# Altium PCB HLW8012-Demo.PcbDoc (part 2 of 2)
Units mil, origin at the board's own origin, x right, y up, seen from the top; angles counter-clockwise.
Board outline 2529.72 x 3317.12 mil, 2 copper layers (Top Layer, Bottom Layer); 82 components, 76 nets, 315 pads, 169 vias.
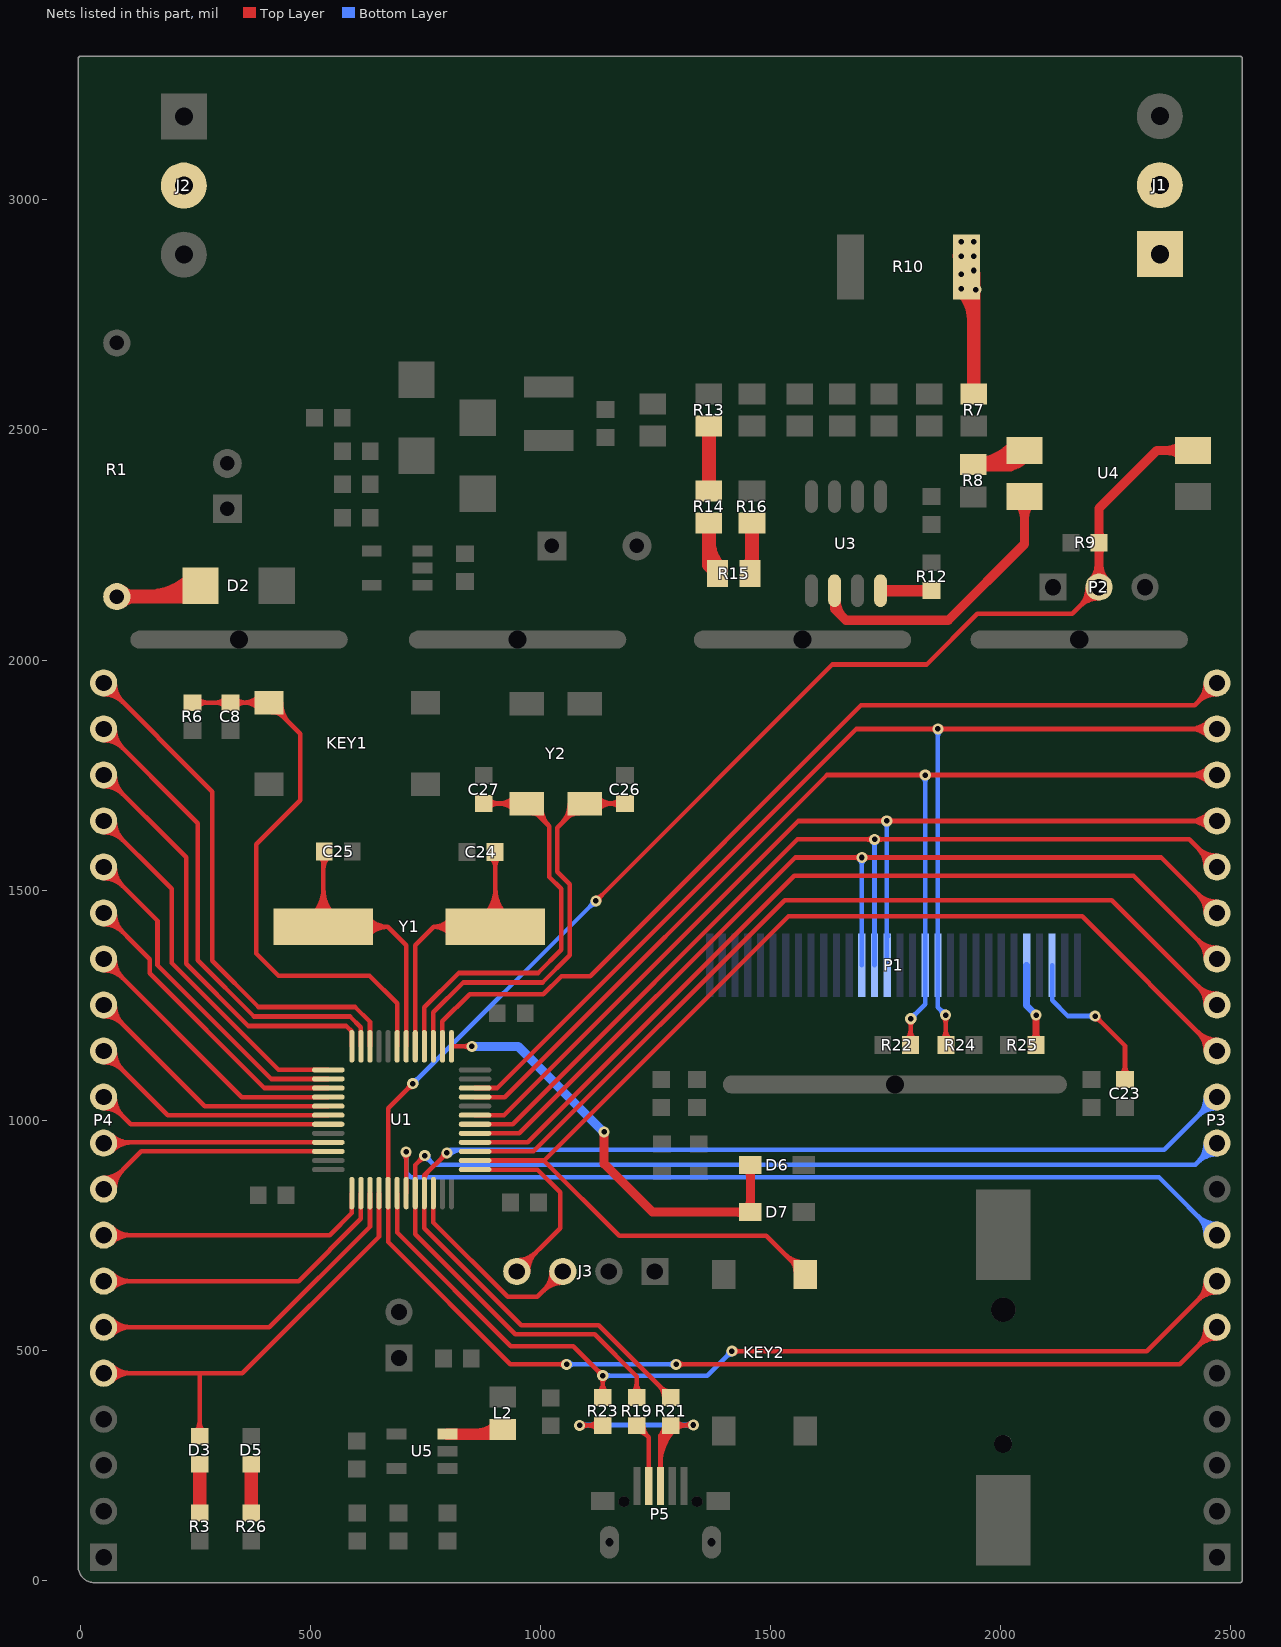
[diagram p2: the nets of this part, all layers, seen from the top]

## Via types
v1: diameter 24, hole 12, Top Layer to Bottom Layer, tented both sides, 169 vias

## Nets (pads, with @x,y where several pads share a name; then routed paths per layer and width w, separated by ;. In a path a pad name is that pad's centre, name@x,y a point inside that pad or via, vN(x,y) a via of type N, cw(c..) or ccw(c..) an arc to the next point about the centre after c; other vN are vias at no path point) (continued)
NetC23_2: C23.2 P1.28 | length 452.2
  Top Layer w10: v1@2204.72,1219.38 cw(c2204.72,1202.48) 2216.67,1214.43 cw(c2228.62,1226.38) v1@2211.72,1226.38 ; v1(2204.72,1226.38) 2269.69,1161.42 C23.2@2269.69,1088.19 ; C23.2@2260.28,1097.6 ccw(c2237.56,1120.32) 2269.69,1120.32 ccw(c2301.81,1120.32) C23.2@2279.09,1097.6
  Bottom Layer w10: P1.28@2111.22,1336.61 2111.22,1260.83 2145.67,1226.38 v1(2204.72,1226.38) ; v1@2199.77,1221.43 ccw(c2187.82,1209.48) 2187.82,1226.38 ccw(c2187.82,1243.28) v1@2199.77,1231.33
NetD2_1: D2.1 R1.2 | length 409.2
  Top Layer w30: R1.2@78.74,2137.8 237.2,2137.8 D2.1@260.83,2161.42 ; R1.2@89.01,2127.52 cw(c113.81,2102.72) 113.81,2137.8 cw(c113.81,2172.87) R1.2@89.01,2148.07 ; 144.96,2137.8 ccw(c144.96,2277.28) D2.1@243.59,2178.65 ; 217.39,2137.8 ccw(c217.39,2204.85) D2.1@264.81,2157.44
NetD3_A: D3.A R3.1 | length 105.9
  Top Layer w30: R3.1@258.86,146.46 D3.A@258.86,252.36
NetD5_A: D5.A R26.1 | length 105.7
  Top Layer w30: R26.1@371.06,146.46 D5.A@371.06,252.17
NetJ1_1: J1.1 R7.2 R10.1 | length 417.7
  Top Layer w30: R10.1@1911.65,2841.03 cw(c1924.85,2822.49) R10.1@1940.94,2838.58 ; R10.1@1914.92,2802.72 cw(c1852.11,2739.9) 1940.94,2739.9 ; R10.1@1925.2,2854.33 R10.1@1940.94,2838.58 ; R7.2@1940.94,2578.35 R10.1@1940.94,2838.58 ; R10.1@1910.39,2877.95 ccw(c1931.66,2877.95) 1916.62,2862.91 cw(c1931.66,2877.95) R10.1@1910.39,2877.95
  other v1: 1945.87,2805.12 1913.39,2807.09 1913.39,2838.58 1940.94,2846.46 1913.39,2877.95 1940.94,2877.95 1913.39,2909.45 1940.94,2909.45
NetJ1_2: J1.2 J2.2
NetL2_1: L2.1 U5.3 | length 171.4
  Top Layer w25: U5.3@797.24,317.91 907.09,317.91 L2.1@917.32,328.15 ; 861.56,317.91 ccw(c861.56,377.81) L2.1@903.91,335.46
NetP1_26: P1.26 R25.2 | length 222.9
  Top Layer w15: R25.2@2068.93,1172.01 ccw(c2050.48,1190.46) 2076.57,1190.46 ccw(c2102.67,1190.46) R25.2@2084.22,1172.01 ; R25.2@2076.57,1163.39 v1(2076.57,1228.15) v1@2076.77,1228.35
  Bottom Layer w15: P1.26@2056.1,1336.61 2056.1,1249.02 v1@2076.77,1228.35
NetP5_2: P5.2 R19.2 | length 193.4
  Top Layer w10: R19.2@1208.66,336.81 1234.84,310.63 P5.2@1234.84,204.7 ; R19.2@1209.65,323.5 cw(c1209.65,293.75) 1230.68,314.79 ; R19.2@1222.95,336.81 ccw(c1257.45,336.81) 1233.06,312.41
NetP5_3: P5.3 R21.2 R23.2 | length 931.3
  Top Layer w10: v1(1084.65,336.61) 1084.84,336.81 R23.2@1134.84,336.81 ; v1@1089.6,331.66 cw(c1102.02,319.24) 1102.02,336.81 ; v1@1089.6,341.56 ccw(c1101.07,353.04) 1101.07,336.81 ; R23.2@1124.45,327.4 ccw(c1101.73,304.68) 1101.73,336.81 ccw(c1101.73,368.94) R23.2@1124.45,346.22 ; P5.3@1260.34,204.7 1260.34,314.67 ; 1260.34,253.62 cw(c1364.69,253.62) R21.2@1290.91,327.4 ; 1260.34,277.76 cw(c1340.55,277.76) R21.2@1283.83,334.47 ; 1260.34,301.9 cw(c1316.41,301.9) R21.2@1276.76,341.54 ; 1260.46,314.79 cw(c1281.5,293.75) R21.2@1281.5,323.5 ; R21.2@1268.22,335.84 cw(c1241.15,333.87) 1260.34,314.67 ; R21.2@1292.87,327.4 cw(c1315.59,304.68) 1315.59,336.81 cw(c1315.59,368.94) R21.2@1292.87,346.22 ; 1312.89,336.81 ccw(c1312.89,356.4) v1@1326.74,342.55 ; 1316.69,336.81 cw(c1316.69,322.6) v1@1326.74,332.65 ; v1(1331.69,337.6) 1330.91,336.81 R21.2@1282.48,336.81 1260.34,314.67
  Bottom Layer w10: v1(1084.65,336.61) 1085.63,337.6 v1(1331.69,337.6) ; v1@1089.6,331.66 cw(c1103.92,317.34) 1103.92,337.6 ; v1@1089.6,341.56 ccw(c1099.17,351.14) 1099.17,337.6 ; v1@1326.74,332.65 ccw(c1314.79,320.7) 1314.79,337.6 ccw(c1314.79,354.5) v1@1326.74,342.55
NetR8_1: R8.1 U4.1 | length 306.5
  Top Layer w30: 2007.19,2424.8 ccw(c2007.19,2486.15) U4.1@2052.85,2445.18 ; U4.1@2027.37,2451.5 cw(c2001.27,2444.01) 2020.47,2424.8 ; U4.1@2030.53,2465.21 cw(c1939.97,2546.48) R8.1@1939.96,2424.8 2020.47,2424.8 ; U4.1@2051.18,2455.51 2020.47,2424.8
NetR12_1: R12.1 U3.8 | length 111.1
  Top Layer w25: U3.8@1738.39,2150.59 1849.21,2150.59 R12.1@1849.41,2150.79
NetR13_1: R13.1 R14.2 | length 140.6
  Top Layer w30: R14.2@1365.55,2367.72 R13.1@1365.55,2508.27
NetR14_1: R14.1 R15.2 | length 182.4
  Top Layer w30: 1365.55,2258.16 ccw(c1448.31,2258.16) R15.2@1389.79,2199.63 ; R14.1@1365.55,2297.64 1365.55,2206.69 R15.2@1384.25,2187.99
NetR15_1: R15.1 R16.2 | length 139.1
  Top Layer w30: R15.1@1448.79,2199.63 ccw(c1424.01,2224.41) 1459.06,2224.41 ; R15.1@1454.33,2187.99 1459.06,2192.72 R16.2@1459.06,2297.64
NetU3_6: U3.6 U4.2 | length 748.2
  Top Layer w20: U3.6@1638.39,2150.59 1638.39,2111.61 1663.39,2086.61 1885.83,2086.61 2051.18,2251.97 U4.2@2051.18,2355.51 ; U3.6@1642.17,2128.94 ccw(c1693.11,2128.94) 1657.09,2092.91 ; U4.2@2037.37,2341.7 cw(c2004.04,2308.37) 2051.18,2308.37 cw(c2098.32,2308.37) U4.2@2064.99,2341.7
NRST: C8.2 KEY1.1 R6.1 U1.7 | length 1562.7
  Top Layer w10: R6.1@243.11,1907.28 243.31,1907.48 KEY1.1@409.45,1907.48 477.36,1839.57 477.36,1694.88 381.89,1599.41 381.89,1362.2 430.12,1313.98 627.95,1313.98 687.99,1253.94 U1.7@687.99,1160.43 ; R6.1@253.5,1897.87 cw(c276.7,1874.68) 276.7,1907.48 ; R6.1@253.5,1916.69 ccw(c275.75,1938.93) 275.75,1907.48 ; 292.2,1907.48 cw(c292.2,1874.68) C8.2@315.39,1897.87 ; 293.15,1907.48 ccw(c293.15,1938.93) C8.2@315.39,1916.69 ; C8.2@336.18,1897.87 cw(c359.37,1874.68) 359.37,1907.48 ; C8.2@336.18,1916.69 ccw(c358.42,1938.93) 358.42,1907.48 ; KEY1.1@388.98,1892.92 ccw(c353.83,1857.77) 353.83,1907.48 ccw(c353.83,1957.19) KEY1.1@388.98,1922.04 ; KEY1.1@415.35,1886.89 cw(c415.35,1851.44) 440.42,1876.51 ; KEY1.1@425.94,1907.48 ccw(c465.77,1907.48) 437.61,1879.32 ; KEY1.1@435.94,1907.48 ccw(c499.91,1907.48) 454.68,1862.25
OLED_CS: P1.13 P3.15 U1.41 | length 2372.5
  Top Layer w10: U1.41@857.28,971.46 953.74,971.46 1553.15,1570.87 1673.23,1570.87 2348.82,1570.87 P3.15@2469.49,1450.2 ; v1@1692.88,1565.92 ccw(c1680.94,1553.97) 1680.94,1570.87 ccw(c1680.94,1587.77) v1@1692.88,1575.82 ; v1@1702.78,1565.92 cw(c1714.73,1553.97) 1714.73,1570.87 cw(c1714.73,1587.77) v1@1702.78,1575.82 ; P3.15@2444.96,1450.2 ccw(c2385.75,1450.2) 2427.62,1492.07 ccw(c2469.49,1533.94) P3.15@2469.49,1474.72 ; P3.15@2454.96,1450.2 ccw(c2419.89,1450.2) 2444.69,1475 ccw(c2469.49,1499.8) P3.15@2469.49,1464.72
  Bottom Layer w10: v1@1692.88,1565.92 cw(c1680.93,1553.97) 1697.83,1553.97 cw(c1714.73,1553.97) v1@1702.78,1565.92 ; P1.13@1697.83,1336.61 v1(1697.83,1570.87)
OLED_D0: P1.18 P3.18 R22.2 U1.45 | length 2833.2
  Top Layer w10: U1.45@857.28,1050.2 922.24,1050.2 1622.24,1750.2 P3.18@2469.49,1750.2 ; R22.2@1794.53,1173.78 ccw(c1771.81,1196.5) 1803.94,1196.5 ccw(c1836.06,1196.5) R22.2@1813.35,1173.78 ; v1@1799.18,1215.52 cw(c1787.71,1204.05) 1803.94,1204.05 ; R22.2@1803.94,1163.39 1803.94,1220.28 v1(1804.13,1220.47) ; 1803.94,1203.1 cw(c1821.51,1203.1) v1@1809.08,1215.52 ; 1818.26,1750.2 cw(c1818.26,1732.63) v1@1830.68,1745.05 ; 1819.21,1750.2 ccw(c1819.21,1766.42) v1@1830.68,1754.95 ; v1@1840.58,1745.05 cw(c1853,1732.63) 1853,1750.2 ; v1@1840.58,1754.95 ccw(c1852.05,1766.42) 1852.05,1750.2 ; P3.18@2452.14,1732.85 ccw(c2410.27,1690.98) 2410.27,1750.2 ccw(c2410.27,1809.41) P3.18@2452.14,1767.54 ; P3.18@2459.22,1739.92 ccw(c2434.42,1715.12) 2434.42,1750.2 ccw(c2434.42,1785.27) P3.18@2459.22,1760.47
  Bottom Layer w10: v1(1804.13,1220.47) 1835.63,1251.97 P1.18@1835.63,1336.61 v1(1835.63,1750) ; v1@1804.13,1227.47 ccw(c1804.13,1244.37) 1816.08,1232.42 ccw(c1828.03,1220.47) v1@1811.13,1220.47 ; v1@1830.68,1745.05 cw(c1818.73,1733.1) 1835.63,1733.1 cw(c1852.53,1733.1) v1@1840.58,1745.05
OLED_D1: P1.19 P3.19 R24.2 U1.46 | length 2961.1
  Top Layer w10: U1.46@857.28,1069.88 905.51,1069.88 1685.83,1850.2 P3.19@2469.49,1850.2 ; 1845.81,1850.2 ccw(c1845.81,1867.77) v1@1858.24,1855.34 ; 1846.76,1850.2 cw(c1846.76,1833.97) v1@1858.24,1845.44 ; v1@1868.14,1845.44 cw(c1879.61,1833.97) 1879.61,1850.2 ; v1@1868.14,1855.34 ccw(c1880.56,1867.77) 1880.56,1850.2 ; R24.2@1871.69,1173.78 ccw(c1851.83,1193.65) 1879.92,1193.65 ; v1@1874.97,1223.4 cw(c1863.02,1211.45) 1879.92,1211.45 cw(c1896.82,1211.45) v1@1884.87,1223.4 ; 1879.92,1199.35 ccw(c1916.08,1199.35) R24.2@1890.51,1173.78 ; v1(1879.92,1228.35) 1879.92,1164.57 R24.2@1881.1,1163.39 ; P3.19@2452.14,1832.85 ccw(c2410.27,1790.98) 2410.27,1850.2 ccw(c2410.27,1909.41) P3.19@2452.14,1867.54 ; P3.19@2459.22,1839.92 ccw(c2434.42,1815.12) 2434.42,1850.2 ccw(c2434.42,1885.27) P3.19@2459.22,1860.47
  Bottom Layer w10: v1@1858.24,1845.44 cw(c1846.29,1833.49) 1863.19,1833.49 cw(c1880.09,1833.49) v1@1868.14,1845.44 ; v1(1863.19,1850.39) P1.19@1863.19,1336.61 1863.19,1245.08 v1(1879.92,1228.35) ; v1@1872.92,1228.35 ccw(c1856.02,1228.35) 1867.97,1240.3 ccw(c1879.92,1252.25) v1@1879.92,1235.35
OLED_DC: P1.15 P3.17 U1.43 | length 2427.3
  Top Layer w10: U1.43@857.28,1010.83 920.28,1010.83 1559.65,1650.2 P3.17@2469.49,1650.2 ; 1734.12,1650.2 ccw(c1734.12,1668.44) v1@1747.02,1655.54 ; 1736.02,1650.2 cw(c1736.02,1634.64) v1@1747.02,1645.64 ; v1@1756.92,1645.64 cw(c1767.92,1634.64) 1767.92,1650.2 ; v1@1756.92,1655.54 ccw(c1769.82,1668.44) 1769.82,1650.2 ; P3.17@2452.14,1632.85 ccw(c2410.27,1590.98) 2410.27,1650.2 ccw(c2410.27,1709.41) P3.17@2452.14,1667.54 ; P3.17@2459.22,1639.92 ccw(c2434.42,1615.12) 2434.42,1650.2 ccw(c2434.42,1685.27) P3.17@2459.22,1660.47
  Bottom Layer w10: v1@1747.02,1645.64 cw(c1735.07,1633.69) 1751.97,1633.69 cw(c1768.87,1633.69) v1@1756.92,1645.64 ; 1751.97,1406.95 ccw(c1762.27,1406.95) P1.15@1754.99,1399.67 ; v1(1751.97,1650.59) 1751.97,1337.6 P1.15@1752.95,1336.61
OLED_RES: P1.14 P3.16 U1.42 | length 2394.9
  Top Layer w10: U1.42@857.28,991.14 938.98,991.14 1558.07,1610.24 2409.45,1610.24 P3.16@2469.49,1550.2 ; v1@1720.44,1605.29 ccw(c1708.49,1593.34) 1708.49,1610.24 ccw(c1708.49,1627.14) v1@1720.44,1615.19 ; v1@1730.34,1605.29 cw(c1742.29,1593.34) 1742.29,1610.24 cw(c1742.29,1627.14) v1@1730.34,1615.19 ; P3.16@2444.96,1550.2 ccw(c2385.75,1550.2) 2427.62,1592.07 ccw(c2469.49,1633.94) P3.16@2469.49,1574.72 ; P3.16@2454.96,1550.2 ccw(c2419.89,1550.2) 2444.69,1575 ccw(c2469.49,1599.8) P3.16@2469.49,1564.72
  Bottom Layer w10: v1@1720.44,1605.29 cw(c1708.49,1593.34) 1725.39,1593.34 cw(c1742.29,1593.34) v1@1730.34,1605.29 ; P1.14@1725.39,1336.61 v1(1725.39,1610.24)
OSC32_IN: C26.1 U1.3 Y2.1 | length 1134.7
  Top Layer w10: U1.3@766.73,1160.43 766.73,1234.25 831.69,1299.21 1003.94,1299.21 1062.99,1358.27 1062.99,1512.8 1035.7,1540.09 1035.7,1635.83 1087.87,1687.99 Y2.1@1095.47,1687.99 1095.67,1688.19 C26.1@1183.07,1688.19 ; 1045.54,1645.66 ccw(c1003.21,1687.99) Y2.1@1063.07,1687.99 ; 1055.69,1655.81 cw(c1083.66,1627.84) Y2.1@1083.66,1667.4 ; Y2.1@1062.61,1662.73 ccw(c1037.35,1687.99) Y2.1@1073.07,1687.99 ; Y2.1@1114.77,1680.5 cw(c1133.33,1661.95) 1133.33,1688.19 ; Y2.1@1121.84,1673.43 cw(c1157.47,1637.81) 1157.47,1688.19 ; Y2.1@1121.84,1702.55 ccw(c1156.52,1737.23) 1156.52,1688.19 ; C26.1@1172.68,1678.78 ccw(c1149.96,1656.06) 1149.96,1688.19 ccw(c1149.96,1720.32) C26.1@1172.68,1697.6
OSC32_OUT: C27.1 U1.4 Y2.4 | length 1130.2
  Top Layer w10: U1.4@747.05,1160.43 747.05,1245.08 821.85,1319.88 994.09,1319.88 1044.29,1370.08 1044.29,1502.95 1018.7,1528.54 1018.7,1638.78 ; C27.1@875.98,1688.19 969.29,1688.19 Y2.4@969.49,1687.99 1018.7,1638.78 ; C27.1@886.38,1678.78 cw(c909.09,1656.06) 909.09,1688.19 cw(c909.09,1720.32) C27.1@886.38,1697.6 ; 907.49,1688.19 cw(c907.49,1637.81) Y2.4@943.12,1673.43 ; 908.44,1688.19 ccw(c908.44,1737.23) Y2.4@943.12,1702.55 ; 931.63,1688.19 cw(c931.63,1661.95) Y2.4@950.19,1680.5 ; Y2.4@981.3,1667.4 cw(c981.3,1646.21) 996.29,1661.19 ; Y2.4@991.84,1686.96 ccw(c1032.93,1682.94) 1003.74,1653.74 ; Y2.4@1001.79,1685.99 ccw(c1060.19,1680.27) 1018.7,1638.78
OSC_IN: C24.1 U1.5 Y1.1 | length 993.6
  Top Layer w10: U1.5@727.36,1160.43 727.36,1379.92 767.72,1420.28 ; Y1.1@804.26,1400.94 ccw(c767.72,1376.08) 767.72,1420.28 ; Y1.1@804.26,1439.61 cw(c767.72,1464.47) 767.72,1420.28 ; Y1.1@812.53,1406.57 ccw(c786.62,1388.94) 786.62,1420.28 ccw(c786.62,1451.61) Y1.1@812.53,1433.98 ; Y1.1@877.27,1444.58 ccw(c818.6,1503.25) 901.57,1503.25 ccw(c984.55,1503.25) Y1.1@925.88,1444.58 ; Y1.1@884.34,1437.51 ccw(c842.74,1479.11) 901.57,1479.11 ccw(c960.41,1479.11) Y1.1@918.81,1437.51 ; C24.1@890.98,1572.28 cw(c865.42,1546.72) 901.57,1546.72 ; C24.1@900.39,1582.68 901.57,1581.5 Y1.1@901.57,1420.28 767.72,1420.28 ; 901.57,1552.42 cw(c929.67,1552.42) C24.1@909.8,1572.28
OSC_OUT: C25.1 U1.6 Y1.2 | length 1026.3
  Top Layer w10: Y1.2@503.26,1444.58 ccw(c444.58,1503.25) 527.56,1503.25 ccw(c610.54,1503.25) Y1.2@551.86,1444.58 ; Y1.2@510.33,1437.51 ccw(c468.73,1479.11) 527.56,1479.11 ccw(c586.39,1479.11) Y1.2@544.79,1437.51 ; C25.1@520.31,1573.27 cw(c502.82,1555.78) 527.56,1555.78 ; 527.56,1545.33 cw(c567.08,1545.33) C25.1@539.13,1573.27 ; C25.1@529.72,1583.66 527.56,1581.5 Y1.2@527.56,1420.28 667.32,1420.28 ; Y1.2@615.6,1405.19 cw(c646.7,1380.66) 646.7,1420.28 cw(c646.7,1459.89) Y1.2@615.6,1435.36 ; Y1.2@623.45,1399 cw(c667.32,1364.41) 667.32,1420.28 ; Y1.2@623.45,1441.55 ccw(c667.32,1476.14) 667.32,1420.28 ; U1.6@707.68,1160.43 707.68,1379.92 667.32,1420.28
PA0: P4.20 U1.10 | length 1300.4
  Top Layer w10: P4.20@50.2,1925.67 cw(c50.2,1866.45) 92.07,1908.33 cw(c133.94,1950.2) P4.20@74.72,1950.2 ; P4.20@50.2,1935.67 cw(c50.2,1900.6) 75,1925.4 cw(c99.8,1950.2) P4.20@64.72,1950.2 ; P4.20@50.2,1950.2 286.42,1713.98 286.42,1346.46 386.81,1246.06 596.46,1246.06 628.94,1213.58 U1.10@628.94,1160.43
PA1: P4.19 U1.11 | length 1191.7
  Top Layer w10: P4.19@50.2,1825.67 cw(c50.2,1766.45) 92.07,1808.33 cw(c133.94,1850.2) P4.19@74.72,1850.2 ; P4.19@50.2,1835.67 cw(c50.2,1800.6) 75,1825.4 cw(c99.8,1850.2) P4.19@64.72,1850.2 ; P4.19@50.2,1850.2 254.92,1645.47 254.92,1347.44 376.97,1225.39 585.63,1225.39 609.25,1201.77 U1.11@609.25,1160.43
PA2: P4.18 U1.12 | length 1092.2
  Top Layer w10: P4.18@50.2,1725.67 cw(c50.2,1666.45) 92.07,1708.33 cw(c133.94,1750.2) P4.18@74.72,1750.2 ; P4.18@50.2,1735.67 cw(c50.2,1700.6) 75,1725.4 cw(c99.8,1750.2) P4.18@64.72,1750.2 ; P4.18@50.2,1750.2 229.33,1571.06 229.33,1339.57 364.17,1204.72 577.76,1204.72 589.57,1192.91 U1.12@589.57,1160.43 ; 586.88,1195.6 cw(c581.64,1190.35) U1.12@589.05,1190.35
PA3: P4.17 U1.13 | length 954.7
  Top Layer w10: P4.17@50.2,1625.67 cw(c50.2,1566.45) 92.07,1608.33 cw(c133.94,1650.2) P4.17@74.72,1650.2 ; P4.17@50.2,1635.67 cw(c50.2,1600.6) 75,1625.4 cw(c99.8,1650.2) P4.17@64.72,1650.2 ; P4.17@50.2,1650.2 197.83,1502.56 197.83,1341.54 430.12,1109.25 U1.13@538.39,1109.25
PA4: P4.16 U1.14 | length 883.6
  Top Layer w10: P4.16@50.2,1525.67 cw(c50.2,1466.45) 92.07,1508.33 cw(c133.94,1550.2) P4.16@74.72,1550.2 ; P4.16@50.2,1535.67 cw(c50.2,1500.6) 75,1525.4 cw(c99.8,1550.2) P4.16@64.72,1550.2 ; P4.16@50.2,1550.2 167.32,1433.07 167.32,1336.61 414.37,1089.57 U1.14@538.39,1089.57
PA5: P4.15 U1.15 | length 811.9
  Top Layer w10: P4.15@50.2,1425.67 cw(c50.2,1366.45) 92.07,1408.33 cw(c133.94,1450.2) P4.15@74.72,1450.2 ; P4.15@50.2,1435.67 cw(c50.2,1400.6) 75,1425.4 cw(c99.8,1450.2) P4.15@64.72,1450.2 ; P4.15@50.2,1450.2 150.32,1350.07 150.32,1319.17 399.61,1069.88 U1.15@538.39,1069.88
PA6: P4.14 U1.16 | length 760.6
  Top Layer w10: P4.14@50.2,1325.67 cw(c50.2,1266.45) 92.07,1308.33 cw(c133.94,1350.2) P4.14@74.72,1350.2 ; P4.14@50.2,1335.67 cw(c50.2,1300.6) 75,1325.4 cw(c99.8,1350.2) P4.14@64.72,1350.2 ; P4.14@50.2,1350.2 350.2,1050.2 U1.16@538.39,1050.2
PA7: P4.13 U1.17 | length 727.3
  Top Layer w10: P4.13@50.2,1225.67 cw(c50.2,1166.45) 92.07,1208.33 cw(c133.94,1250.2) P4.13@74.72,1250.2 ; P4.13@50.2,1235.67 cw(c50.2,1200.6) 75,1225.4 cw(c99.8,1250.2) P4.13@64.72,1250.2 ; P4.13@50.2,1250.2 269.88,1030.51 U1.17@538.39,1030.51
PA8: P2.2 P3.6 R9.1 U1.29 U4.4 | length 5396.1
  Top Layer w10: v1@714.95,1079.23 cw(c698.05,1079.23) 710,1067.28 cw(c721.95,1055.33) v1@721.95,1072.23 ; v1(721.95,1079.23) 668.31,1025.59 U1.29@668.31,841.54 668.31,735.24 934.06,469.49 v1(1056.1,469.49) ; v1@1051.15,464.54 ccw(c1039.2,452.59) 1039.2,469.49 ccw(c1039.2,486.39) v1@1051.15,474.44 ; v1(1120.08,1476.38) 1633.86,1990.16 1838.58,1990.16 1948.82,2100.39 2155.12,2100.39 P2.2@2213.19,2158.46 ; v1@1120.08,1483.38 ccw(c1120.08,1500.28) 1132.03,1488.33 ccw(c1143.98,1476.38) v1@1127.08,1476.38 ; v1(1294.29,469.49) 2388.78,469.49 P3.6@2469.49,550.2 ; v1@1299.24,464.54 cw(c1311.19,452.59) 1311.19,469.49 cw(c1311.19,486.39) v1@1299.24,474.44 ; P2.2@2188.66,2158.46 cw(c2129.45,2158.46) 2171.32,2116.59 cw(c2213.19,2074.72) P2.2@2213.19,2133.94 ; P2.2@2198.66,2158.46 cw(c2163.59,2158.46) 2188.39,2133.66 cw(c2213.19,2108.86) P2.2@2213.19,2143.94 ; P3.6@2444.96,550.2 cw(c2385.75,550.2) 2427.62,508.33 cw(c2469.49,466.45) P3.6@2469.49,525.67 ; P3.6@2454.96,550.2 cw(c2419.89,550.2) 2444.69,525.4 cw(c2469.49,500.6) P3.6@2469.49,535.67
  Top Layer w20: P2.2@2199.38,2172.27 ccw(c2165.57,2206.08) 2213.39,2206.08 ; R9.1@2207.51,2248.06 cw(c2193.33,2233.88) 2213.39,2233.88 cw(c2233.44,2233.88) R9.1@2219.26,2248.06 ; R9.1@2207.51,2261.78 ccw(c2193.33,2275.96) 2213.39,2275.96 ccw(c2233.44,2275.96) R9.1@2219.26,2261.78 ; P2.2@2213.19,2158.46 2213.39,2158.66 R9.1@2213.39,2254.92 2213.39,2329.53 2339.37,2455.51 U4.4@2417.32,2455.51 ; 2213.39,2205.13 ccw(c2259.86,2205.13) P2.2@2227,2172.27 ; U4.4@2393.67,2441.7 ccw(c2360.34,2408.37) 2360.34,2455.51 ccw(c2360.34,2502.66) U4.4@2393.67,2469.32
  Bottom Layer w10: v1(721.95,1079.23) 1119.09,1476.38 v1(1120.08,1476.38) ; v1@721.95,1086.23 ccw(c721.95,1103.13) 733.9,1091.18 ccw(c745.85,1079.23) v1@728.95,1079.23 ; v1(1056.1,469.49) v1(1294.29,469.49) ; v1@1061.05,464.54 cw(c1073,452.59) 1073,469.49 cw(c1073,486.39) v1@1061.05,474.44 ; 1106.45,1463.73 cw(c1120.08,1450.1) v1@1120.08,1469.38 ; 1108.82,1466.11 ccw(c1098.56,1476.38) v1@1113.08,1476.38 ; v1@1289.34,464.54 ccw(c1277.39,452.59) 1277.39,469.49 ccw(c1277.39,486.39) v1@1289.34,474.44
PA9: P3.7 R23.1 U1.30 | length 2459.7
  Top Layer w10: U1.30@687.99,841.54 687.99,755.91 935.04,508.86 1070.87,508.86 v1(1134.84,444.88) R23.1@1134.84,397.44 ; R23.1@1125.43,406.85 ccw(c1102.72,429.57) 1134.84,429.57 ccw(c1166.97,429.57) R23.1@1144.25,406.85 ; v1@1127.84,444.88 ccw(c1110.94,444.88) 1122.89,456.83 ccw(c1134.84,468.78) v1@1134.84,451.88 ; v1@1129.89,439.93 cw(c1117.94,427.98) 1134.84,427.98 cw(c1151.74,427.98) v1@1139.79,439.93 ; v1(1415.35,498.03) 2317.32,498.03 P3.7@2469.49,650.2 ; v1@1420.3,493.08 cw(c1432.25,481.13) 1432.25,498.03 cw(c1432.25,514.93) v1@1420.3,502.98 ; P3.7@2444.96,650.2 cw(c2385.75,650.2) 2427.62,608.33 cw(c2469.49,566.45) P3.7@2469.49,625.67 ; P3.7@2454.96,650.2 cw(c2419.89,650.2) 2444.69,625.4 cw(c2469.49,600.6) P3.7@2469.49,635.67
  Bottom Layer w10: v1(1134.84,444.88) 1362.2,444.88 v1(1415.35,498.03) ; v1@1139.79,439.93 cw(c1151.74,427.98) 1151.74,444.88 cw(c1151.74,461.78) v1@1139.79,449.83 ; v1@1408.35,498.03 cw(c1391.45,498.03) 1403.4,486.08 cw(c1415.35,474.13) v1@1415.35,491.03
PA10: P3.8 U1.31 | length 2154
  Top Layer w10: v1@702.73,926.15 cw(c690.78,914.2) 707.68,914.2 cw(c724.58,914.2) v1@712.63,926.15 ; U1.31@707.68,841.54 v1(707.68,931.1)
  Bottom Layer w10: v1@702.73,926.15 cw(c690.78,914.2) 707.68,914.2 cw(c724.58,914.2) v1@712.63,926.15 ; v1(707.68,931.1) 707.68,885.83 717.52,875.98 2343.7,875.98 P3.8@2469.49,750.2 ; P3.8@2444.96,750.2 ccw(c2385.75,750.2) 2427.62,792.07 ccw(c2469.49,833.94) P3.8@2469.49,774.72 ; P3.8@2454.96,750.2 ccw(c2419.89,750.2) 2444.69,775 ccw(c2469.49,799.8) P3.8@2469.49,764.72
PA11: P3.10 R19.1 U1.32 | length 2835.2
  Top Layer w10: v1@741.03,923.23 cw(c724.13,923.23) 736.08,911.28 cw(c748.03,899.33) v1@748.03,916.23 ; v1(748.03,923.23) 727.36,902.56 U1.32@727.36,841.54 727.36,751.97 944.88,534.45 1117.13,534.45 1208.66,442.91 R19.1@1208.66,397.44 ; R19.1@1199.25,406.85 ccw(c1176.54,429.57) 1208.66,429.57 ccw(c1240.79,429.57) R19.1@1218.07,406.85
  Bottom Layer w10: v1@748.03,916.23 cw(c748.03,899.33) 759.98,911.28 cw(c771.93,923.23) v1@755.03,923.23 ; v1(748.03,923.23) 767.72,903.54 2422.83,903.54 P3.10@2469.49,950.2 ; P3.10@2444.96,950.2 cw(c2385.75,950.2) 2427.62,908.33 cw(c2469.49,866.45) P3.10@2469.49,925.67 ; P3.10@2454.96,950.2 cw(c2419.89,950.2) 2444.69,925.4 cw(c2469.49,900.6) P3.10@2469.49,935.67
PA12: P3.11 R21.1 U1.33 | length 2865.8
  Top Layer w10: U1.33@747.56,871.46 cw(c769.23,871.46) 753.91,886.78 ; v1@789.26,929.13 cw(c772.36,929.13) 784.31,917.18 cw(c796.26,905.23) v1@796.26,922.13 ; v1@793.31,926.18 747.05,879.92 U1.33@747.05,841.54 747.05,764.76 957.68,554.13 1126.4,554.13 1282.48,398.06 R21.1@1282.48,397.44 ; 1257.65,422.89 cw(c1232.2,397.44) R21.1@1268.19,397.44 ; 1261.51,419.03 ccw(c1281.5,439.01) R21.1@1281.5,410.75
  Bottom Layer w10: v1(796.26,929.13) 803.15,936.02 2355.31,936.02 P3.11@2469.49,1050.2 ; v1@801.21,924.18 cw(c829.79,895.6) 829.79,936.02 ; P3.11@2444.96,1050.2 cw(c2385.75,1050.2) 2427.62,1008.33 cw(c2469.49,966.45) P3.11@2469.49,1025.67 ; P3.11@2454.96,1050.2 cw(c2419.89,1050.2) 2444.69,1025.4 cw(c2469.49,1000.6) P3.11@2469.49,1035.67
PA15: KEY2.1 P3.12 U1.38 | length 2880.3
  Top Layer w10: U1.38@857.28,912.4 1006.89,912.4 1170.28,749.02 1490.16,749.02 KEY2.1@1574.8,664.37 ; 1007.87,912.4 1538.39,1442.91 2176.77,1442.91 P3.12@2469.49,1150.2 ; 1529.57,709.6 ccw(c1574.8,754.83) KEY2.1@1574.8,690.87 ; 1543.83,695.34 cw(c1518.76,670.28) KEY2.1@1554.21,670.28 ; 1546.64,692.53 ccw(c1574.8,720.69) KEY2.1@1574.8,680.87 ; P3.12@2444.96,1150.2 ccw(c2385.75,1150.2) 2427.62,1192.07 ccw(c2469.49,1233.94) P3.12@2469.49,1174.72 ; P3.12@2454.96,1150.2 ccw(c2419.89,1150.2) 2444.69,1175 ccw(c2469.49,1199.8) P3.12@2469.49,1164.72
PB0: P4.12 U1.18 | length 694
  Top Layer w10: P4.12@50.2,1125.67 cw(c50.2,1066.45) 92.07,1108.33 cw(c133.94,1150.2) P4.12@74.72,1150.2 ; P4.12@50.2,1135.67 cw(c50.2,1100.6) 75,1125.4 cw(c99.8,1150.2) P4.12@64.72,1150.2 ; P4.12@50.2,1150.2 189.57,1010.83 U1.18@538.39,1010.83
PB1: P4.11 U1.19 | length 660.8
  Top Layer w10: P4.11@50.2,1025.67 cw(c50.2,966.45) 92.07,1008.33 cw(c133.94,1050.2) P4.11@74.72,1050.2 ; P4.11@50.2,1035.67 cw(c50.2,1000.6) 75,1025.4 cw(c99.8,1050.2) P4.11@64.72,1050.2 ; P4.11@50.2,1050.2 109.25,991.14 U1.19@538.39,991.14
PB3: P3.13 U1.39 | length 2081.1
  Top Layer w10: U1.39@857.28,932.09 984.25,932.09 1530.51,1478.35 2241.34,1478.35 P3.13@2469.49,1250.2 ; P3.13@2444.96,1250.2 ccw(c2385.75,1250.2) 2427.62,1292.07 ccw(c2469.49,1333.94) P3.13@2469.49,1274.72 ; P3.13@2454.96,1250.2 ccw(c2419.89,1250.2) 2444.69,1275 ccw(c2469.49,1299.8) P3.13@2469.49,1264.72
PB4: P3.14 U1.40 | length 2075.5
  Top Layer w10: U1.40@857.28,951.77 971.46,951.77 1551.18,1531.5 2288.19,1531.5 P3.14@2469.49,1350.2 ; P3.14@2444.96,1350.2 ccw(c2385.75,1350.2) 2427.62,1392.07 ccw(c2469.49,1433.94) P3.14@2469.49,1374.72 ; P3.14@2454.96,1350.2 ccw(c2419.89,1350.2) 2444.69,1375 ccw(c2469.49,1399.8) P3.14@2469.49,1364.72
PB10: P4.10 U1.21 | length 636.9
  Top Layer w10: P4.10@50.2,950.2 51.77,951.77 U1.21@538.39,951.77 ; P4.10@60.47,939.92 cw(c89.07,911.32) 89.07,951.77 ; P4.10@60.47,960.47 ccw(c81.47,981.47) 81.47,951.77 ; P4.10@67.54,932.85 cw(c113.21,887.18) 113.21,951.77 ; P4.10@67.54,967.54 ccw(c105.61,1005.61) 105.61,951.77
PB11: P4.9 U1.22 | length 670.2
  Top Layer w10: P4.9@50.2,850.2 132.09,932.09 U1.22@538.39,932.09 ; P4.9@50.2,864.72 ccw(c50.2,899.8) 75,875 ccw(c99.8,850.2) P4.9@64.72,850.2 ; P4.9@50.2,874.72 ccw(c50.2,933.94) 92.07,892.07 ccw(c133.94,850.2) P4.9@74.72,850.2
PB12: P4.8 U1.25 | length 750.7
  Top Layer w10: P4.8@50.2,750.2 541.54,750.2 589.57,798.23 U1.25@589.57,841.54 ; P4.8@60.47,739.92 cw(c85.27,715.12) 85.27,750.2 cw(c85.27,785.27) P4.8@60.47,760.47 ; P4.8@67.54,732.85 cw(c109.41,690.98) 109.41,750.2 cw(c109.41,809.41) P4.8@67.54,767.54
PB13: P4.7 U1.26 | length 819.3
  Top Layer w10: P4.7@50.2,650.2 474.02,650.2 609.25,785.43 U1.26@609.25,841.54 ; P4.7@60.47,639.92 cw(c85.27,615.12) 85.27,650.2 cw(c85.27,685.27) P4.7@60.47,660.47 ; P4.7@67.54,632.85 cw(c109.41,590.98) 109.41,650.2 cw(c109.41,709.41) P4.7@67.54,667.54
PB14: P4.6 U1.27 | length 890.2
  Top Layer w10: P4.6@50.2,550.2 410.43,550.2 628.94,768.7 U1.27@628.94,841.54 ; P4.6@60.47,539.92 cw(c85.27,515.12) 85.27,550.2 cw(c85.27,585.27) P4.6@60.47,560.47 ; P4.6@67.54,532.85 cw(c109.41,490.98) 109.41,550.2 cw(c109.41,609.41) P4.6@67.54,567.54
PB15: D3.K P4.5 U1.28 | length 1151.6
  Top Layer w10: P4.5@50.2,450.2 258.86,450.2 ; P4.5@60.47,439.92 cw(c85.27,415.12) 85.27,450.2 cw(c85.27,485.27) P4.5@60.47,460.47 ; P4.5@67.54,432.85 cw(c109.41,390.98) 109.41,450.2 cw(c109.41,509.41) P4.5@67.54,467.54 ; D3.K@249.45,322.4 ccw(c226.73,345.12) 258.86,345.12 ccw(c290.98,345.12) D3.K@268.27,322.4 ; D3.K@258.86,312.99 258.86,450.2 ; U1.28@648.62,841.54 648.62,747.05 351.77,450.2 258.86,450.2
PC13: P3.20 U1.2 | length 2190
  Top Layer w10: U1.2@786.42,1160.43 786.42,1214.57 845.47,1273.62 1005.91,1273.62 1045.28,1312.99 1107.28,1312.99 1696.06,1901.77 2421.06,1901.77 P3.20@2469.49,1950.2 ; P3.20@2444.96,1950.2 cw(c2385.75,1950.2) 2427.62,1908.33 cw(c2469.49,1866.45) P3.20@2469.49,1925.67 ; P3.20@2454.96,1950.2 cw(c2419.89,1950.2) 2444.69,1925.4 cw(c2469.49,1900.6) P3.20@2469.49,1935.67
SWCLK: J3.4 U1.37 | length 564.8
  Top Layer w10: U1.37@857.28,892.72 993.11,892.72 1042.32,843.5 1042.32,765.55 J3.4@948.03,671.26 ; J3.4@948.03,685.79 ccw(c948.03,720.86) 972.83,696.06 ccw(c997.63,671.26) J3.4@962.56,671.26 ; J3.4@948.03,695.79 ccw(c948.03,755) 989.9,713.13 ccw(c1031.77,671.26) J3.4@972.56,671.26
SWDIO: J3.3 U1.34 | length 583.1
  Top Layer w10: U1.34@766.73,841.54 766.73,777.56 928.15,616.14 992.91,616.14 J3.3@1048.03,671.26 ; J3.3@1023.5,671.26 cw(c964.29,671.26) 1006.16,629.39 cw(c1048.03,587.52) J3.3@1048.03,646.73 ; J3.3@1033.5,671.26 cw(c998.43,671.26) 1023.23,646.46 cw(c1048.03,621.66) J3.3@1048.03,656.73
VBAT: D6.2 D7.2 U1.1 | length 1078
  Top Layer w10: U1.1@806.1,1160.43 v1(850.39,1160.43) ; v1@845.44,1155.48 ccw(c833.49,1143.53) 833.49,1160.43 ccw(c833.49,1177.33) v1@845.44,1165.38
  Top Layer w20: v1(1137.8,974.41) 1137.8,905.51 1243.11,800.2 D7.2@1455.71,800.2 D6.2@1455.71,902.56 ; D7.2@1443.94,793.35 ccw(c1427.41,776.82) 1427.41,800.2 ccw(c1427.41,823.58) D7.2@1443.94,807.05 ; D7.2@1448.86,807.05 ccw(c1432.33,823.58) 1455.71,823.58 ccw(c1479.09,823.58) D7.2@1462.56,807.05 ; D6.2@1448.86,895.71 cw(c1432.33,879.18) 1455.71,879.18 cw(c1479.09,879.18) D6.2@1462.56,895.71
  Bottom Layer w20: v1(850.39,1160.43) 950.79,1160.43 v1@1137.3,973.92
pads on no net: B1.3 B1.4 KEY1.3 KEY1.4 KEY2.3 KEY2.4 P1.7 P1.20 P5. P5.4 U3.7 Y2.2 Y2.3

## Polygon pours and split planes (outlines as drawn)
DGND on Top Layer "Keep-Out Layer-No Net" (solid, remove dead copper, pour order 4): 0,0 2519.69,0 2519.69,2024.61 2520.67,2025.59 2516.73,2029.53 2321.85,2029.53 0,2029.53
DGND on Bottom Layer "Keep-Out Layer-No Net" (solid, remove dead copper, pour order 3): 0,0 2519.69,0 2519.69,2024.61 2520.67,2025.59 2516.73,2029.53 2321.85,2029.53 0,2029.53

## Keep-outs
Keep-Out Layer:
  lines w10: 0,30 ccw(c30,30) 30,0 2519.69,0 2519.69,3307.09 0,3307.09 0,30

## Other copper
Top Layer:
  rectangle net DGND: 775.59,267.72 933.07,292.32
  rectangle net DGND: 1359.25,173.23 1381.89,274.61
  rectangle net DGND: 1302.17,214.57 1375.98,274.61
  pour cut-out: 1164.37,2.95 1162.4,4.92 1162.4,156.5 1337.6,156.5 1344.49,163.39 1346.46,161.42 1346.46,-1.97
Bottom Layer:
  rectangle net NetJ1_2: 253.94,3046.26 2371.06,3069.88
  rectangle net NetJ1_2: 248.03,2993.11 2346.46,3016.73
  rectangle net AC220V-L: 154.53,3128.94 2410.43,3250.98
  rectangle net NetJ1_2: 155.51,2981.3 2407.48,3083.66
  rectangle net AC220V-N: 167.32,2784.45 1704.72,2930.12
  rectangle net NetJ1_1: 1881.89,2786.42 2417.32,2928.15
  rectangle net AC220V-N: 243.11,2877.95 1655.51,2901.57
  rectangle net AC220V-N: 205.71,2814.96 1675.2,2838.58
  rectangle net NetJ1_1: 1954.72,2817.91 2358.27,2841.54
  rectangle net NetJ1_1: 1941.93,2888.78 2302.17,2912.4
  rectangle net AC220V-L: 217.52,3144.69 2315.94,3168.31
  rectangle net AC220V-L: 223.43,3197.83 2340.55,3221.46

## Silkscreen, mask and mechanical layers (free items; w line width, h text height)
Top Overlay:
  drawing of 905 lines, arcs and shapes, not listed
  text "HLW8012-Demo v1.1" at 1530.51,3172.24 h60
  text "L" at 419.29,3165.35 h100
  text "L" at 2122.05,3157.48 h100
  text "2017-03-30" at 1781.5,3064.96 h60
  text "E" at 414.37,2999.02 h100
  text "E" at 2117.13,2991.14 h100
  text "WWW.SZLCSC.COM" at 522.06,2862.61 h70
  text "N" at 413.39,2843.5 h100
  text "N" at 2116.14,2835.63 h100
  text "OUT" at 2259.84,2683.07 h100
  text "IN" at 183.07,2680.12 h100
  text "A0" at 119.59,1935.52 h60
  text "C13" at 2314.08,1931.02 h60
  text "A1" at 119.59,1833.52 h60
  text "B9" at 2314.08,1829.02 h60
  text "B8" at 2314.08,1729.02 h60
  text "A2" at 119.59,1727.52 h60
  text "A3" at 119.59,1630.52 h60
  text "B7" at 2314.08,1624.02 h60
  text "A4" at 119.59,1527.52 h60
  text "B6" at 2314.08,1528.02 h60
  text "A5" at 119.59,1428.52 h60
  text "B5" at 2314.08,1426.02 h60
  text "A6" at 119.59,1329.52 h60
  text "B4" at 2314.08,1328.02 h60
  text "B3" at 2314.08,1228.02 h60
  text "A7" at 119.59,1226.52 h60
  text "B0" at 119.59,1134.52 h60
  text "A15" at 2314.08,1128.02 h60
  text "A12" at 2314.08,1031.02 h60
  text "B1" at 119.59,1027.52 h60
  text "B10" at 119.59,932.52 h60
  text "A11" at 2314.08,930.02 h60
  text "B11" at 119.59,839.52 h60
  text "G" at 2354.33,831.69 h60
  text "B12" at 119.59,733.52 h60
  text "A10" at 2314.08,731.02 h60
  text "B13" at 119.59,631.52 h60
  text "A9" at 2314.08,631.02 h60
  text "3.3" at 1218.5,571.85 h60
  text "DIO" at 1015.75,567.91 h60
  text "G" at 1136.81,567.91 h60
  text "CLK" at 880.91,566.93 h60
  text "G" at 527.56,564.96 h60
  text "B14" at 119.59,532.52 h60
  text "A8" at 2314.08,531.02 h60
  text "BOOT0" at 446.85,451.77 h60
  text "B15" at 119.59,431.52 h60
  text "G" at 2314.08,428.02 h60
  text "G" at 119.59,328.52 h60
  text "G" at 2314.08,329.02 h60
  text "G" at 119.59,229.52 h60
  text "5V" at 2314.08,226.02 h60
  text "3.3" at 119.59,134.52 h60
  text "5V" at 2314.08,127.02 h60
  text "5V" at 2314.08,33.02 h60
  text "3.3" at 119.59,29.52 h60
Drill Drawing:
  text ".Legend" at 14,3413 h80

## Dimensions
0,3307.09 to 30,0 on Mechanical 15
0,30 to 2519.69,0 on Mechanical 15